# Altium PCB PCB1.PcbDoc
Units mil, origin at the board's own origin, x right, y up, seen from the top; angles counter-clockwise.
Board outline 6000 x 4000 mil, 2 copper layers (Top Layer, Bottom Layer); 25 components, 28 nets, 56 pads, 0 vias.
Unrouted connection lines stored in the file: 24.
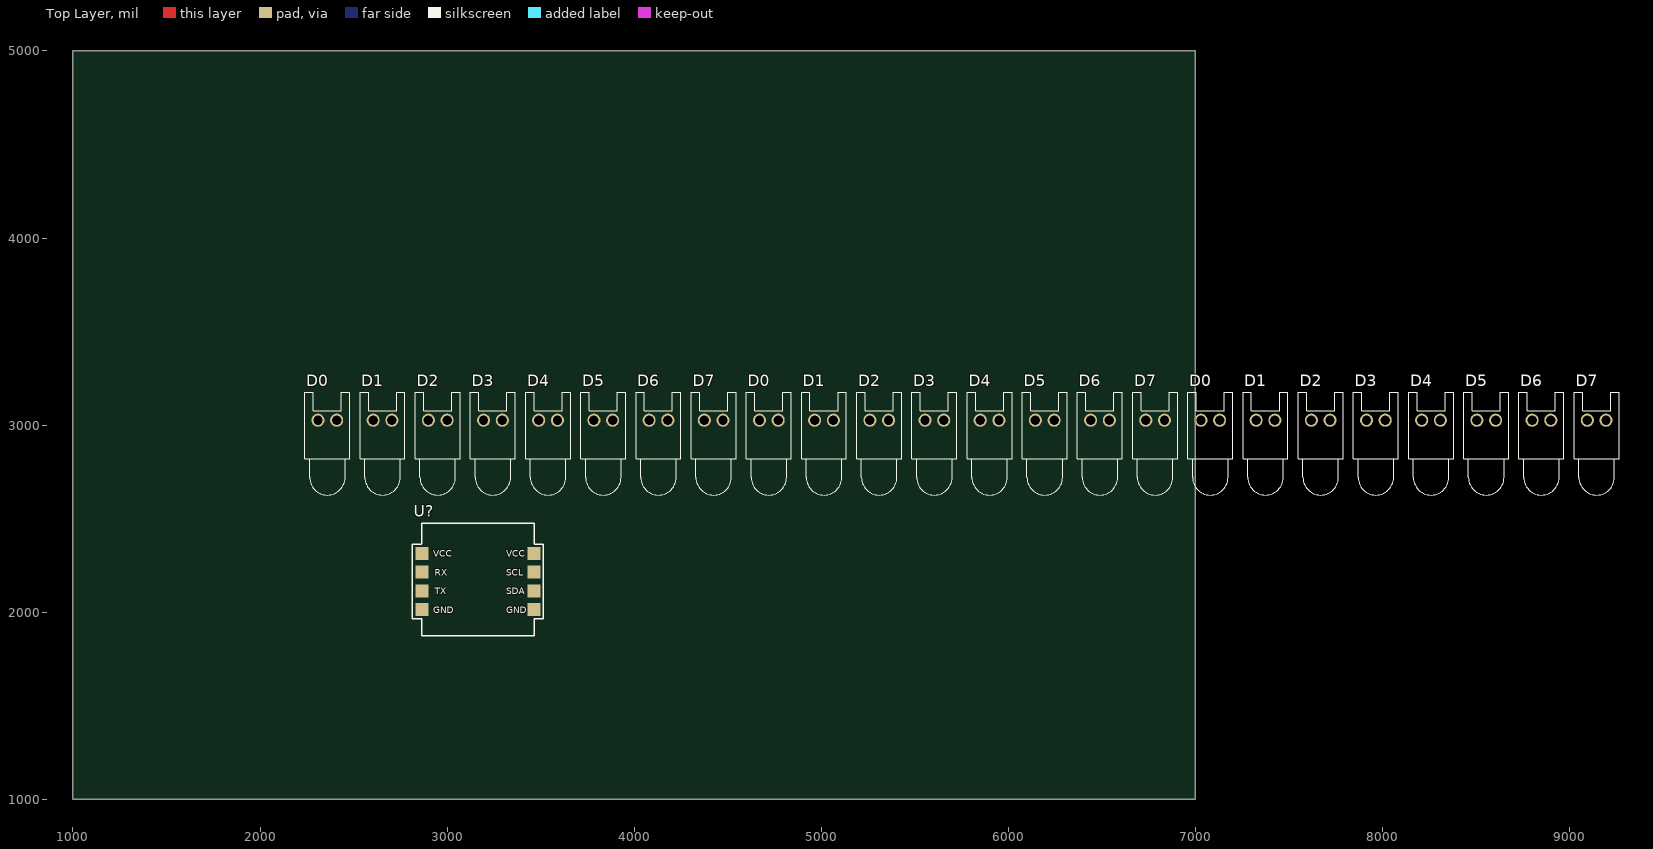
[diagram p0: Top Layer view]
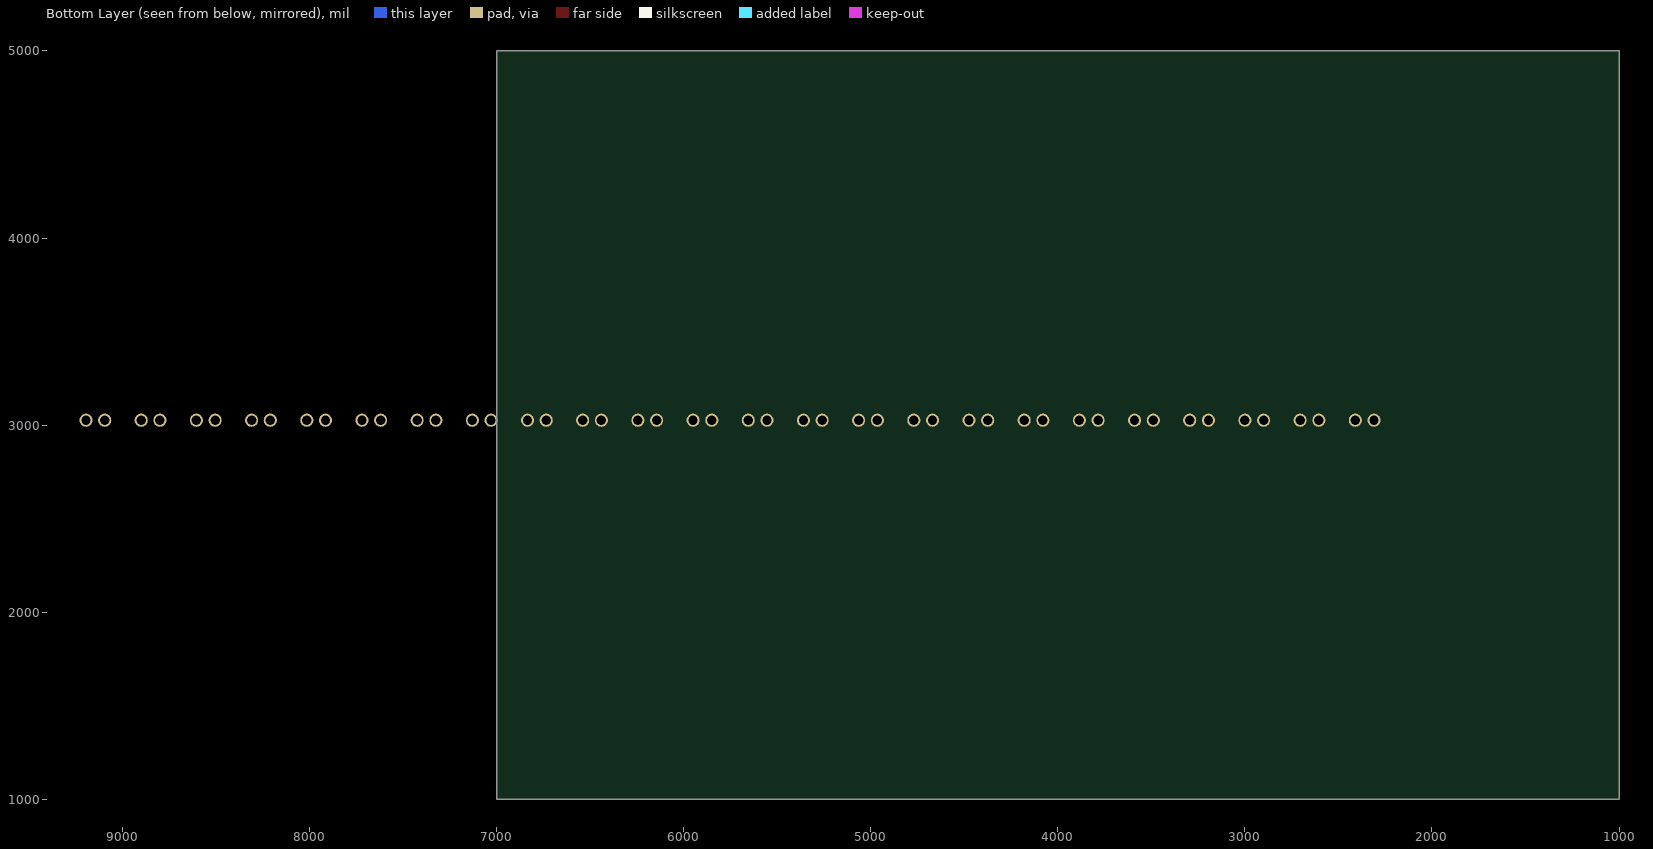
[diagram p1: Bottom Layer view, seen from below]

## Layer stack, top to bottom
Top Solder: solder mask 0.4, Solder Resist, Dk 3.5
Top Layer: signal copper 1.4
Dielectric 1: dielectric 12.6, FR-4, Dk 4.8
Bottom Layer: signal copper 1.4
Bottom Solder: solder mask 0.4, Solder Resist, Dk 3.5

## Board outline
1000,1000 7000,1000 7000,5000 1000,5000

## Design rules (kind name [scope] priority, off if disabled: settings)
Clearance [All] p1: gap=10
PolygonConnect [All] p1: connectstyle=Relief reliefconductorwidth=10 reliefentries=4 polygonreliefangle="90 Angle" airgapwidth=10
RoomDefinition Sche [InComponentClass('Sche')] p1: confinementstyle=ConfineIn formatcopy=TRUE lockcomponents=FALSE outline 1470,2566 9275,2566 9275,3286 1470,3286
RoutingVias [All] p1: holewidth=28 width=50 viastyle="Through Hole" minholewidth=28 minwidth=50 maxholewidth=28 maxwidth=50
SolderMaskExpansion [All] p1: expansion=4
UnpouredPolygon [All] p1: allowunpoured=FALSE
Width [All] p1: maxlimit=10 minlimit=10 preferedwidth=10
29 further rules are at their usual default settings.

## Classes and differential pairs
component class Sche: _Li_Battery D0 D1 D2 D3 D4 D5 D6 D7 U? ""

## Components (designator, comment, footprint, x,y, rotation, side; value= is the part's Value field where it differs from the comment)
D0 "LED1" LED-0 7080,3026 r0 top
D0 "LED1" LED-0 4720,3026 r0 top
D0 "LED0" LED-0 2360,3026 r0 top
D1 "LED1" LED-0 7375,3026 r0 top
D1 "LED1" LED-0 5015,3026 r0 top
D1 "LED0" LED-0 2655,3026 r0 top
D2 "LED1" LED-0 7670,3026 r0 top
D2 "LED1" LED-0 5310,3026 r0 top
D2 "LED0" LED-0 2950,3026 r0 top
D3 "LED1" LED-0 7965,3026 r0 top
D3 "LED1" LED-0 5605,3026 r0 top
D3 "LED0" LED-0 3245,3026 r0 top
D4 "LED1" LED-0 8260,3026 r0 top
D4 "LED1" LED-0 5900,3026 r0 top
D4 "LED0" LED-0 3540,3026 r0 top
D5 "LED1" LED-0 8555,3026 r0 top
D5 "LED1" LED-0 6195,3026 r0 top
D5 "LED0" LED-0 3835,3026 r0 top
D6 "LED1" LED-0 8850,3026 r0 top
D6 "LED1" LED-0 6490,3026 r0 top
D6 "LED0" LED-0 4130,3026 r0 top
D7 "LED1" LED-0 9145,3026 r0 top
D7 "LED1" LED-0 6785,3026 r0 top
D7 "LED0" LED-0 4425,3026 r0 top
U? "MPU6050Mudule" MPU6050Module 2815,1875 r0 top

## Footprints (in the part's own frame and the unit in brackets; to place one, negate y for a bottom-side part, rotate by r counter-clockwise, add the part's x,y. Pads: shape width x height; smd on the part's side, far side on the other; paste and mask are expansions set on the pad)
LED-0 [mil] "LED; 2 Leads"
  round 70 hole 50: 1(50,0) 2(-50,0)
  silkscreen extent -120,-400 120,150
MPU6050Module [mil]
  rect 70x70 smd: 1(50,439) 2(50,339) 3(50,239) 4(50,139) 5(650,139) 6(650,239) 7(650,339) 8(650,439)
  silkscreen extent 0,0 700,600

## Part data
D0 D0 D1 D1 D2 D2 D3 D3 D4 D4 D5 D5 D6 D6 D7 D7: library part LED0, "Typical INFRARED GaAs LED"
D0 D1 D2 D3 D4 D5 D6 D7: "Typical INFRARED GaAs LED"
U?: "君悦智控高精度6轴传感器"

## Nets (pads, with @x,y where several pads share a name; then routed paths per layer and width w, separated by ;. In a path a pad name is that pad's centre, name@x,y a point inside that pad or via, vN(x,y) a via of type N, cw(c..) or ccw(c..) an arc to the next point about the centre after c; other vN are vias at no path point)
GND: D0.2 D1.2 D2.2 D3.2 D4.2 D5.2 D6.2 D7.2 U?.4
MCU_RXD: U?.3
MCU_TXD: U?.2
P0.0: D0.1@2410,3026
P0.1: D1.1@2705,3026
P0.2: D2.1@3000,3026
P0.3: D3.1@3295,3026
P0.4: D4.1@3590,3026
P0.5: D5.1@3885,3026
P0.6: D6.1@4180,3026
P0.7: D7.1@4475,3026
P1.0: D0.1@4770,3026
P1.1: D1.1@5065,3026
P1.2: D2.1@5360,3026
P1.3: D3.1@5655,3026
P1.4: D4.1@5950,3026
P1.5: D5.1@6245,3026
P1.6: D6.1@6540,3026
P1.7: D7.1@6835,3026
P2.0: D0.1@7130,3026
P2.1: D1.1@7425,3026
P2.2: D2.1@7720,3026
P2.3: D3.1@8015,3026
P2.4: D4.1@8310,3026
P2.5: D5.1@8605,3026
P2.6: D6.1@8900,3026
P2.7: D7.1@9195,3026
VCC: U?.1
pads on no net: U?.5 U?.6 U?.7 U?.8

## Text inside footprints (layer, text, board x,y; h text height)
U?: Top Overlay "VCC" at 2925,2295 h35; Top Overlay "VCC" at 3315,2295 h35; Top Overlay "GND" at 2925,1995 h35; Top Overlay "GND" at 3315,1995 h35; Top Overlay "RX" at 2935,2195 h35; Top Overlay "TX" at 2935,2095 h35; Top Overlay "SDA" at 3315,2095 h35; Top Overlay "SCL" at 3315,2195 h35